# Altium PCB Breakout_6pin.PcbDoc
Units mil, origin at the board's own origin, x right, y up, seen from the top; angles counter-clockwise.
Board outline 2165.35 x 984.25 mil, 2 copper layers (Top Layer, Bottom Layer), stack 61.855 mil thick; 7 components, 6 nets, 26 pads, 0 vias.
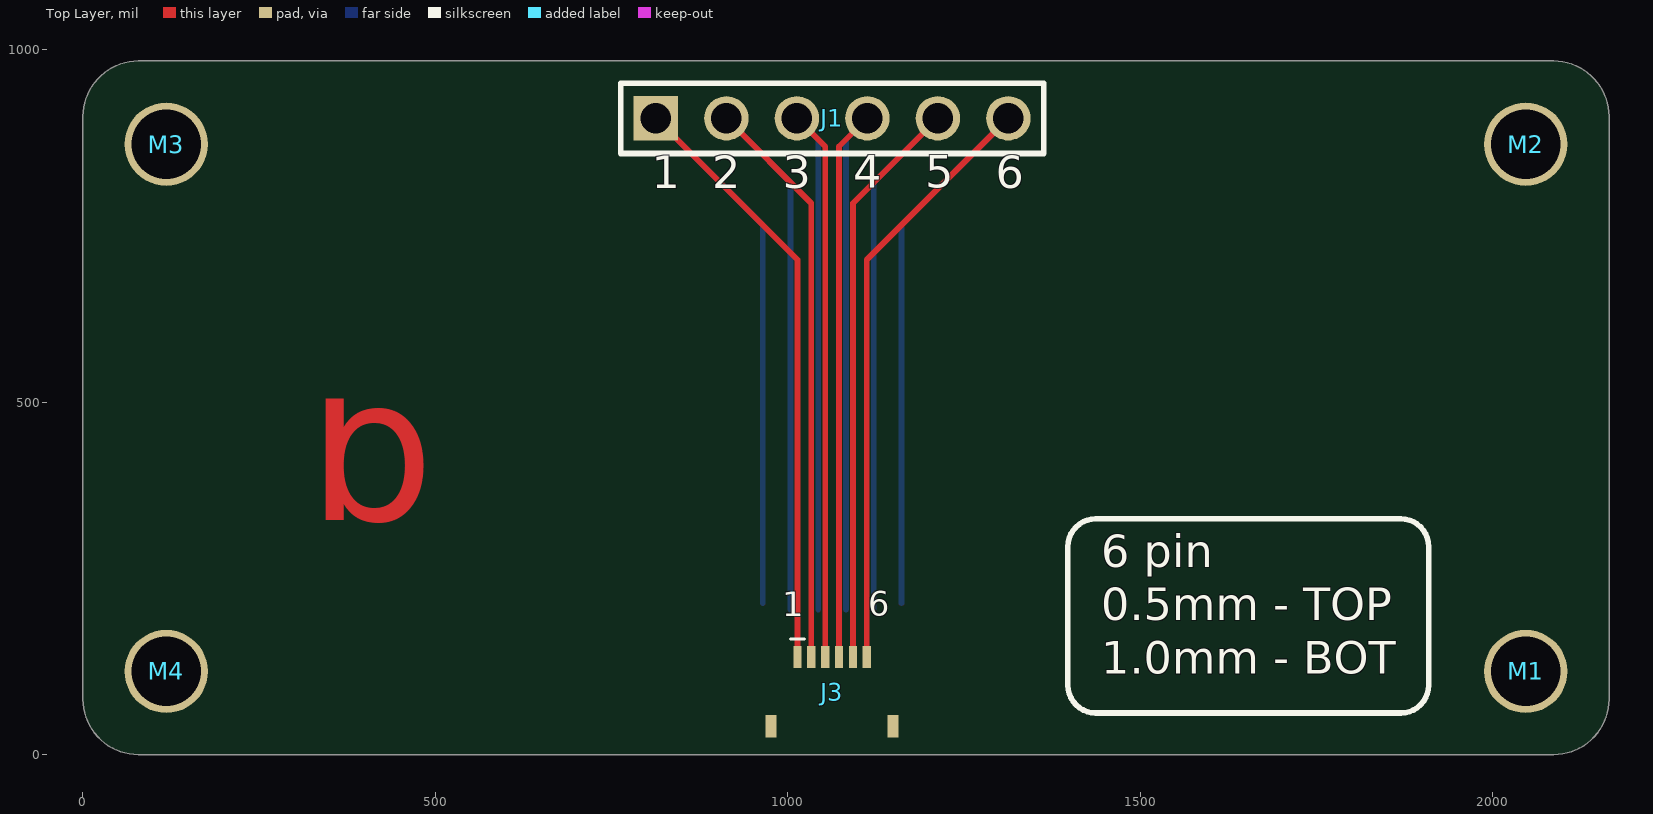
[diagram p0: Top Layer view]
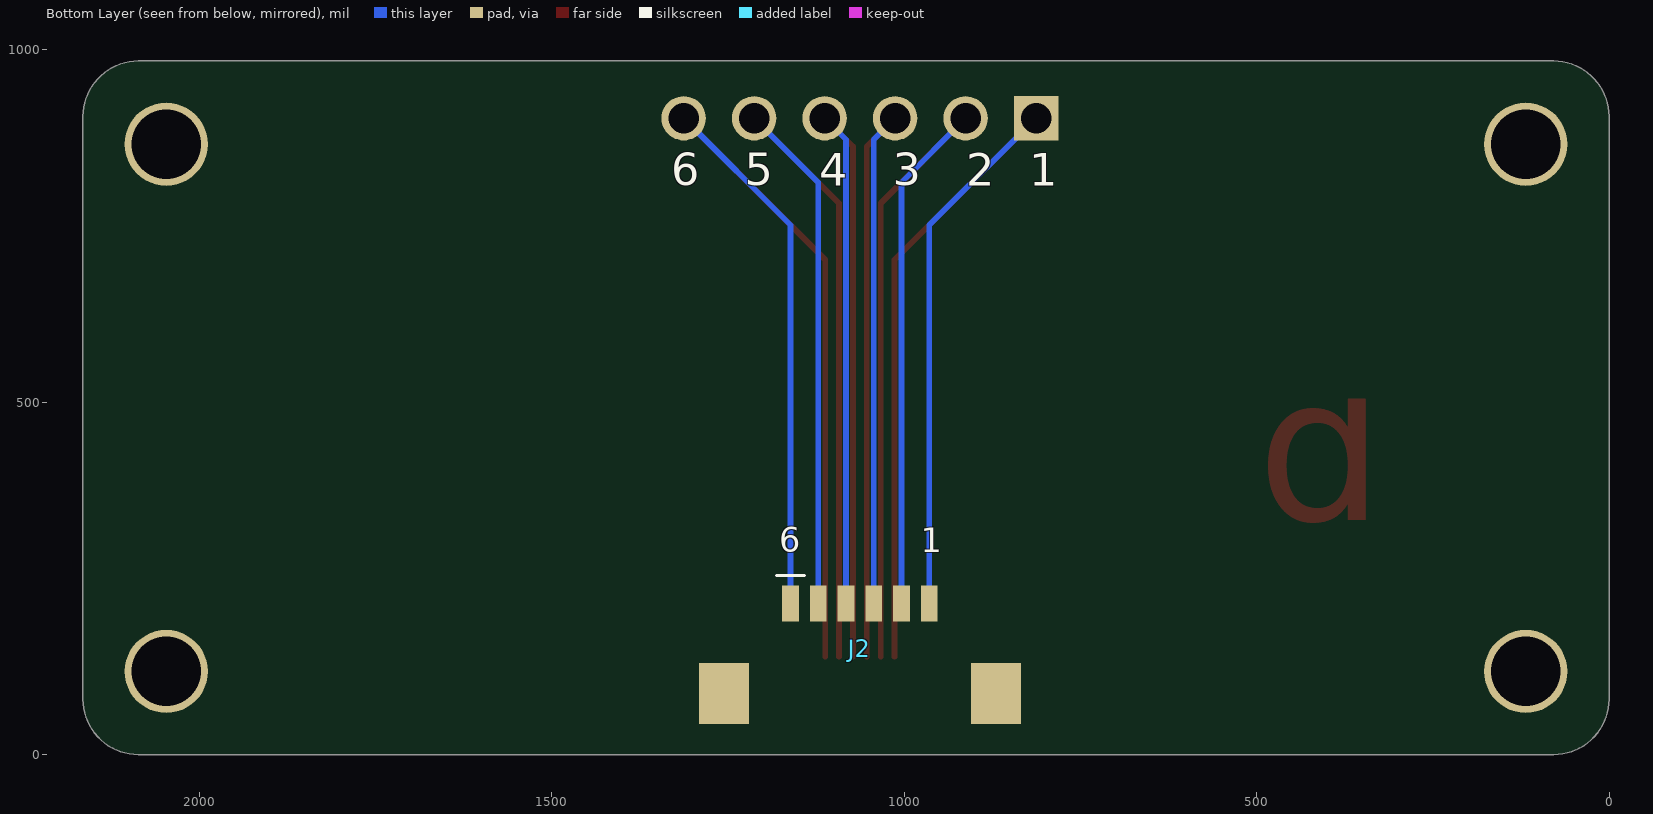
[diagram p1: Bottom Layer view, seen from below]

## Layer stack, top to bottom
Top Solder: solder mask 0.4, Solder Resist, Dk 3.5
Top Layer: signal copper 1.4
Dielectric 1: dielectric 59.0551, FR-4, Dk 4.8
Bottom Layer: signal copper 1.4
Bottom Solder: solder mask 0.4, Solder Resist, Dk 3.5

## Board outline
78.74,0 cw(c78.74,78.74) 0,78.74 0,905.51 cw(c78.74,905.51) 78.74,984.25 2086.61,984.25 cw(c2086.61,905.51) 2165.35,905.51 2165.35,78.74 cw(c2086.61,78.74) 2086.61,0

## Design rules (kind name [scope] priority, off if disabled: settings)
Clearance [All] p1: gap=8.03 ignorepadtopadclearanceinfootprint=TRUE
DiffPairsRouting [All] p1: maxlimit=10 minlimit=2.5 mostfreqgap=5 toplayer_minwidth=7 toplayer_maxwidth=18 toplayer_prefwidth=18 bottomlayer_minwidth=7 bottomlayer_maxwidth=18 bottomlayer_prefwidth=18 impedanceprofiledriven=TRUE maxuncoupledlength=500
HoleSize [All] p1: absolutevalues=TRUE maxlimit=196.85 minlimit=6.02 maxpercent=80.000 minpercent=20.000
MinimumSolderMaskSliver [All] p1: minsoldermaskwidth=7
PolygonConnect [All] p1: connectstyle=Relief reliefconductorwidth=10 reliefentries=4 polygonreliefangle="90 Angle" airgapwidth=10
RoutingVias [All] p1: holewidth=12.01 width=24.02 viastyle="Through Hole" minholewidth=10 minwidth=20 maxholewidth=19.68 maxwidth=50
SolderMaskExpansion [All] p1: expansion=4 istentingtop=FALSE
Width [All] p1: maxlimit=1000 minlimit=8.03 preferedwidth=10 minimp=50.000000 maximp=50.000000 favimp=50.000000
27 further rules are at their usual default settings.

## Classes and differential pairs
component class Main: J1 J2 M1 M2 M3 M4

## Components (designator, comment, footprint, x,y, rotation, side; value= is the part's Value field where it differs from the comment)
J1 "61300611121" HDR-V-1X6 1062.99,902.96 r0 top
J2 "XF3M(1)-0615-1B" CONN-FFC-H-6P-1MM 1062.99,150.75 r180 bottom
J3 "FFC2B28-06-G" CONN-FFC-H-6P-0.5MM 1062.99,89.46 r0 top
M1 "MTG_HOLE" MH_P_2.5MM 2047.24,118.11 r90 top
M2 "MTG_HOLE" MH_P_2.5MM 2047.24,866.14 r90 top
M3 "MTG_HOLE" MH_P_2.5MM 118.11,866.14 r90 top
M4 "MTG_HOLE" MH_P_2.5MM 118.11,118.11 r90 top

## Footprints (in the part's own frame and the unit in brackets; to place one, negate y for a bottom-side part, rotate by r counter-clockwise, add the part's x,y. Pads: shape width x height; smd on the part's side, far side on the other; paste and mask are expansions set on the pad)
CONN-FFC-H-6P-0.5MM [mm]
  rect 0.3x0.8 smd: 1(-1.25,1.25) 2(-0.75,1.25) 3(-0.25,1.25) 4(0.25,1.25) 5(0.75,1.25) 6(1.25,1.25)
  rect 0.4x0.8 smd: ME1(-2.2,-1.25) ME2(2.2,-1.25)
  silkscreen extent -1.5,1.9 -1,1.9, body extent -2.5,-1.8 2.5,1.45, height 1.72
CONN-FFC-H-6P-1MM [mm]
  rect 0.6x1.3 smd: 1(-2.5,1.625) 2(-1.5,1.625) 3(-0.5,1.625) 4(0.5,1.625) 5(1.5,1.625) 6(2.5,1.625)
  rect 1.8x2.2 smd: ME1(-4.9,-1.625) ME2(4.9,-1.625)
  silkscreen extent -3,2.63 -2,2.63, body extent -5.3,-3.67 5.3,2.73, height 2
HDR-V-1X6 [mm]
  rect 1.6x1.6 hole 1.1: 1(-6.35,0)
  round 1.6 hole 1.1: 2(-3.81,0) 3(-1.27,0) 4(1.27,0) 5(3.81,0) 6(6.35,0)
  silkscreen extent -7.62,-1.27 7.62,1.27, body extent -7.62,-1.27 7.62,1.27, height 8.55
MH_P_2.5MM [mm]
  round 3 hole 2.5: 1(0,0)

## Part data
J1: library part HDR-V-1X6-M, "Header, 6-Pin, 0.1\"", Color=Black, Current Rating=3A, Manufacturer 1="Wurth Electronics", Max Operating Temperature=125°C, Min Operating Temperature=-40°C, Supplier Part Number 1=732-5319-ND, Voltage Rating=250V, ComponentLink1Description=http://www.mouser.com/ds/2/445/6130xx11121-538006.pdf?src-supplier=Mouser, ComponentLink1URL=http://www.mouser.com/ds/2/445/6130xx11121-538006.pdf?src-supplier=Mouser, ComponentLink2Description=https://katalog.we-online.de/em/datasheet/6130xx11121.pdf?src-supplier=Digi-Key, ComponentLink2URL=https://katalog.we-online.de/em/datasheet/6130xx11121.pdf?src-supplier=Digi-Key, ComponentLink3Description=http://www.farnell.com/cad/1737268.pdf?src-supplier=Element14, ComponentLink3URL=http://www.farnell.com/cad/1737268.pdf?src-supplier=Element14, Connector Type="Male Pin", Contact Gender=Male, Contact Material="Copper Alloy", Contact Mating Length=0.236inch, Contact Plating=Gold, Gender=Male, Housing Material=PBT, Lead Free="Lead Free", Manufacturer Part Number 1=61300611121, Mount="Through Hole", Number of Contacts=6, Number of Positions=6, Number of Rows=1, Packaging=Bulk, Pitch=0.1inch, Pricing 1="1=0.33000, 10=0.27900, 25=0.23200, 50=0.19400, 100=0.17600, 1000=0.16000 (USD)", REACH SVHC=Unknown, RoHS=Yes, Stock 1=13863, Supplier 1=Digi-Key, Termination="Through Hole"
J2: library part CONN-FFC-H-6P-1MM, "1.0-mm Pitch, Dual Contact ; For FPC/FFC, 6 Contacts, RoHS", Actuator Color=Black, Current Rating=500mA, Flammability Rating="UL94 V-0", Housing Color=Natural, Manufacturer 1=Omron, Max Operating Temperature=85°C, Min Operating Temperature=-30°C, Package Quantity=1500, Supplier Part Number=46Y1126, Voltage Rating=50V, Actuator Material="Polymer,Liquid Crystal Polymer", Category="FFC / FPC", ComponentLink1Description=https://datasheet.ciiva.com/48563/en-xf3m-48563813.pdf?src-supplier=Avnet, ComponentLink1URL=https://datasheet.ciiva.com/48563/en-xf3m-48563813.pdf?src-supplier=Avnet, Contact Material="Copper Alloy", Contact Plating=Gold, Housing Material=Polymer, Manufacturer Part Number 1=XF3M(1)-0615-1B, Mating Cycles=20, Mounting Technology="Surface Mount", Number of Positions=6, Number of Rows=1, Orientation="Right Angle", Packaging="Tape and Reel", Pitch=0.039inch, Pricing="1=1.22, 10=1.05, 25=0.991, 50=0.958, 100=0.945, 250=0.915, 500=0.86, 1000=0.765 (USD)", RoHS=Yes, RoHS Compliant=Yes, Series=XF3M, Stock=212, Supplier=Newark, Termination=Solder
J3: library part CONN-FFC-H-6P-0.5MM, "6 Position FFC, FPC Connector Contacts, Top and Bottom 0.020\" (0.50mm) Surface Mount, Right Angle", Manufacturer 1="Global Connector Technology", Manufacturer Part Number 1=FFC2B28-06-G, Number of Positions=6, Pitch=0.5mm
M1 M2 M3 M4: "MTG HOLE PLATED VARIOUS SIZES"

## Nets (pads, with @x,y where several pads share a name; then routed paths per layer and width w, separated by ;. In a path a pad name is that pad's centre, name@x,y a point inside that pad or via, vN(x,y) a via of type N, cw(c..) or ccw(c..) an arc to the next point about the centre after c; other vN are vias at no path point)
NetJ1_1: J1.1 J2.6 J3.1 | length 1598.5
  Top Layer w8.03: J1.1 1013.78,702.17 J3.1
  Bottom Layer w8.03: J1.1 964.57,751.38 J2.6
NetJ1_2: J1.2 J2.5 J3.2 | length 1548.9
  Top Layer w8.03: J1.2 1033.46,782.48 J3.2
  Bottom Layer w8.03: J1.2 1003.94,812.01 J2.5@1003.94,205.87
NetJ1_3: J1.3 J2.4 J3.3 | length 1490.6
  Top Layer w8.03: J1.3 1053.15,862.8 J3.3
  Bottom Layer w8.03: J1.3 1043.31,872.64 J2.4@1043.31,205.87
NetJ1_4: J1.4 J2.3 J3.4 | length 1490.6
  Top Layer w8.03: J3.4 1072.83,862.8 J1.4
  Bottom Layer w8.03: J2.3@1082.68,205.87 1082.68,872.64 J1.4
NetJ1_5: J1.5 J2.2 J3.5 | length 1548.9
  Top Layer w8.03: J3.5 1092.52,782.48 J1.5
  Bottom Layer w8.03: J2.2@1122.05,205.87 1122.05,812.01 J1.5
NetJ1_6: J1.6 J2.1 J3.6 | length 1598.5
  Top Layer w8.03: J3.6 1112.2,702.17 J1.6
  Bottom Layer w8.03: J2.1 1161.42,751.38 J1.6
pads on no net: J2.ME1 J2.ME2 J3.ME1 J3.ME2 M1.1 M2.1 M3.1 M4.1

## Other copper
Top Layer:
  text "b" at 318.9,220.47 h590.55

## Silkscreen, mask and mechanical layers (free items; w line width, h text height)
Top Overlay:
  lines w7.87: 1397.64,98.43 ccw(c1437.01,98.43) 1437.01,59.06 1870.08,59.06 ccw(c1870.08,98.43) 1909.45,98.43 1909.45,295.28 ccw(c1870.08,295.28) 1870.08,334.65 1437.01,334.65 ccw(c1437.01,295.28) 1397.64,295.28 1397.64,98.43 ; 1397.64,98.43 1397.64,98.43
  text "5" at 1194.82,789.07 h78.74
  text "1" at 807.09,788.24 h78.74
  text "2" at 892.63,788.24 h78.74
  text "3" at 992.94,788.24 h78.74
  text "4" at 1092.94,788.43 h78.74
  text "6" at 1295.28,788.24 h78.74
  text "6 pin" at 1444.88,250.24 h78.74
  text "6" at 1114.17,185.67 h59.06
  text "1" at 992.13,185.04 h59.06
  text "0.5mm - TOP" at 1444.88,174.73 h78.74
  text "1.0mm - BOT" at 1444.88,99.26 h78.74
  text "c" at 124.75,-458.4 h1968.5
Bottom Overlay:
  text "3" at 1016.56,792.17 h78.74
  text "5" at 1226.32,792.17 h78.74
  text "6" at 1330.71,792.17 h78.74
  text "1" at 822.83,791.34 h78.74
  text "2" at 912.32,791.34 h78.74
  text "4" at 1120.5,791.34 h78.74
  text "1" at 976.38,275.59 h59.06
  text "6" at 1177.17,276.22 h59.06
Board Outline:
  lines w3.94: 1062.99,984.25 1082.68,984.25 ; 0,78.74 ccw(c78.74,78.74) 78.74,0 2086.61,0 ccw(c2086.61,78.74) 2165.35,78.74 2165.35,905.51 ccw(c2086.61,905.51) 2086.61,984.25 78.74,984.25 ccw(c78.74,905.51) 0,905.51 0,78.74